# Allegro board WalkingAidDevice.brd
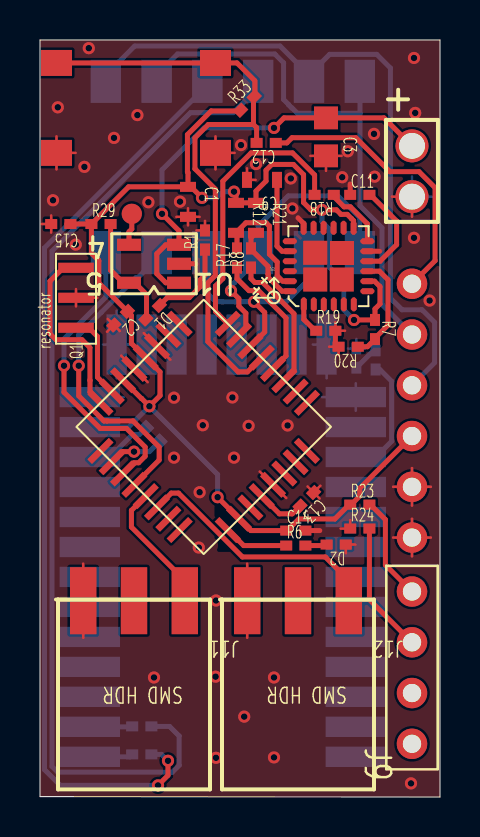
[diagram p0: board, top side]
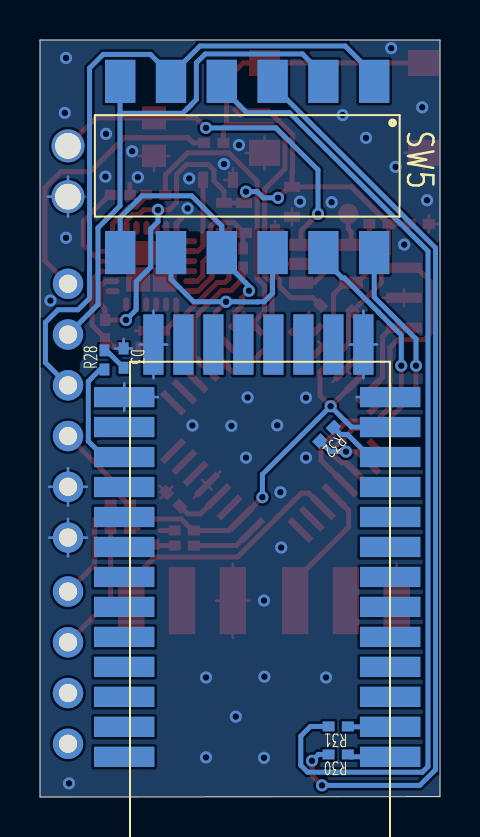
[diagram p1: board, bottom side, seen from below]

Outline 20 x 37.88 mm; copper layers: TOP, BOTTOM. Coordinates in mm from the lower left corner of the outline.
Outline path: 0,37.88 0,0.02 20,0 20,37.88 0,37.88

## Design rules (mm)
constraint set DEFAULT: min track width 0.127

## Placement (name value [footprint] x y rotation side)
C1  10uF  [0603]  7 30.58 270 top
C2  0.1uF  [0402]  4.2 24.48 225 top
C3  10uF  [0805]  13.7 34.08 270 top
C9  2.2nF  [0603]  11.9 31.28 180 top
C11  0.1uF  [0402]  15.5 29.88 0 top
C12  0.1uF  [0402]  11.8 32.98 180 top
C13  0.1uF  [0402]  13.51 15.42 225 top
C14  0.1uF  [0402]  12.3 13.08 0 top
C15  0.1uF  [0402]  1.53 28.92 180 top
D1  LED/RED  [0402]  5.8 24.78 225 top
D2  LED/Yellow  [0402]  15.3 12.88 180 top
D3  LED/Yellow  [0402]  16.07 22.45 270 bottom
J5  HEADER 6  [JUMPER6]  18.6 12.98 90 top
J9  HEADER 4  [JUMPER4]  18.6 10.28 270 top
J11  HEADER 3  [JUMPER3]  4.7 9.88 180 top
J12  HEADER 3  [JUMPER3]  12.9 9.88 180 top
NOREF  -  []  16.43 28.56 0 top
NOREF#2  -  []  20.05 24.68 90 top
P1  Power Connector  [350759-4]  18.6 32.58 270 top
Q1  8Mhz  [RESONATOR_V1]  1.8 24.98 90 top
R1  10K  [0402]  8.5 27.38 90 top
R6  330  [0402]  12.3 12.33 0 top
R7  470  [0402]  16.5 23.88 270 top
R8  0 Ohm  [0402]  10.8 26.48 90 top
R12  4.7K  [0603]  9.4 29.78 270 top
R17  0 Ohm  [0402]  10.1 26.48 90 top
R18  0 Ohm  [0402]  14.7 30.38 180 top
R19  0 Ohm  [0402]  13.8 23.08 0 top
R20  0 Ohm  [0402]  15.9 22.78 180 top
R21  4.7K  [0603]  10.4 29.78 270 top
R23  0 Ohm  [0402]  15.5 14.38 0 top
R24  0 Ohm  [0402]  15.5 13.18 0 top
R28  470  [0402]  16.53 21.38 90 bottom
R29  0 Ohm  [0402]  2.56 28.42 0 top
R30  0 Ohm  [0402]  4.6 2.38 0 bottom
R31  0 Ohm  [0402]  4.6 3.78 0 bottom
R32  0 Ohm  [0402]  5.5 18.68 315 bottom
R33  10K  [0402]  10.2 34.18 45 top
SW5  SW DIP-6  [SW_DIP_6X2]  7.1 31.68 270 bottom
SW6  SW PUSHBUTTON-SPST-2  [SW_4PINS]  4.8 34.48 0 top
TP1  TEST POINT  [TEST_POINT]  4.59 29.18 0 top
U1  MIC5205  [SOT23-5_V1]  5.7 26.68 180 top
U2  ATMEGA328  [TQFP32]  8.19 18.52 315 top
U3  MPU6050  [QFN-24]  16.3 24.68 90 top
U4  -  [HM10_BLE]  9.3 10.48 0 bottom

## Library data of the parts
C1 C3 = CAPACITOR
C2 C9 C11-C15 = CAPACITOR NON-POL
D1-D3 = LED
J5 = HEADER 6
J9 = HEADER 4
J11 J12 = HEADER 3
P1 = Power Connector
Q1 = Resonator
R1 R6-R8 R12 R17-R21 R23 R24 R28-R33 = R
SW5 = SW DIP-6
SW6 = SW PUSHBUTTON-SPST-2
TP1 = TEST POINT
U1 = MIC5205
U2 = ATMEGA328
U3 = MPU6050
U4 = HM10_BLE

## Footprints (pads in the part's own frame, mm; a bottom-side part is the same pattern mirrored in y, then rotated)
0402
  rect 0.6x0.5 smd: 1(0.01,0.25) 2(0.97,0.25)
0603
  rect 0.5x0.8 smd: 1(0.05,0.4) 2(1.55,0.4)
0805
  rect 1.14x1.2 smd: 1(0.1,0.6) 2(2,0.6)
350759-4
  round 1.651 hole 1.295: 1(0,0) 2(2.54,0)
HM10_BLE
  rect 3.023x1.016 smd: 1(-6.81,8.47) 2(-6.81,6.97) 3(-6.81,5.47) 4(-6.81,3.97) 5(-6.81,2.47) 6(-6.81,0.97) 7(-6.81,-0.53) 8(-6.81,-2.03) 9(-6.81,-3.53) 10(-6.81,-5.03) 11(-6.81,-6.53) 12(-6.81,-8.03) 13(-6.81,-9.53) 22(6.49,-9.53) 23(6.49,-8.03) 24(6.49,-6.53) 25(6.49,-5.03) 26(6.49,-3.53) 27(6.49,-2.03) 28(6.49,-0.53) 29(6.49,0.97) 30(6.49,2.47) 31(6.49,3.97) 32(6.49,5.47) 33(6.49,6.97) 34(6.49,8.47)
  rect 1.016x3.023 smd: 14(-5.47,-12.16) 15(-3.97,-12.16) 16(-2.47,-12.16) 17(-0.97,-12.16) 18(0.53,-12.16) 19(2.03,-12.16) 20(3.53,-12.16) 21(5.03,-12.16)
JUMPER3
  rect 1.321x3.353 smd: 1(-2.54,0.06) 2(0,0.06) 3(2.54,0.06)
JUMPER4
  round 1.524 hole 0.914: 1(0,0) 2(2.54,0) 3(5.08,0) 4(7.62,0)
JUMPER6
  round 1.524 hole 0.914: 1(0,0) 2(2.54,0) 3(5.08,0) 4(7.62,0) 5(10.16,0) 6(12.7,0)
QFN-24
  rect 1.2x1.2 smd: (1.21,2.54) (1.21,1.21) (2.54,1.2) (2.55,2.54)
  rrect 0.7x0.3 smd: 1(-0.03,3.11) 2(-0.03,2.61) 3(-0.03,2.11) 4(-0.03,1.61) 5(-0.03,1.11) 6(-0.03,0.61) 13(3.8,0.62) 14(3.8,1.12) 15(3.8,1.62) 16(3.8,2.12) 17(3.8,2.62) 18(3.8,3.12)
  rrect 0.3x0.7 smd: 7(0.63,-0.07) 8(1.13,-0.07) 9(1.63,-0.07) 10(2.13,-0.07) 11(2.63,-0.07) 12(3.13,-0.07) 19(3.13,3.81) 20(2.63,3.81) 21(2.13,3.81) 22(1.63,3.81) 23(1.13,3.81) 24(0.63,3.81)
RESONATOR_V1
  rect 0.508x1.778 smd: 1(-1.5,0) 2(0,0) 3(1.5,0)
SOT23-5_V1
  rect 1.194x0.61 smd: 1(-1.25,0.95) 2(-1.25,0) 3(-1.25,-0.95) 4(1.25,-0.95) 5(1.25,0.95)
SW_4PINS
  rect 1.55x1.3 smd: 1(3.975,-2.25) 2(-3.975,-2.25) 3(3.975,2.25) 4(-3.975,2.25)
SW_DIP_6X2
  rect 2.16x1.52 smd: 1(-4.13,3.81) 2(-4.13,1.27) 3(-4.13,-1.27) 4(-4.13,-3.81) 5(-4.13,-6.35) 6(-4.13,-8.89) 7(4.438,-8.89) 8(4.438,-6.35) 9(4.438,-3.81) 10(4.438,-1.27) 11(4.438,1.27) 12(4.438,3.81)
TEST_POINT
  round 1.016 smd: 1(0,0)
TQFP32
  rect 1.52x0.33 smd: 1(-4.5,2.8) 2(-4.5,2) 3(-4.5,1.2) 4(-4.5,0.4) 5(-4.5,-0.4) 6(-4.5,-1.2) 7(-4.5,-2) 8(-4.5,-2.8) 17(4.5,-2.8) 18(4.5,-2) 19(4.5,-1.2) 20(4.5,-0.4) 21(4.5,0.4) 22(4.5,1.2) 23(4.5,2) 24(4.5,2.8)
  rect 0.33x1.52 smd: 9(-2.8,-4.5) 10(-2,-4.5) 11(-1.2,-4.5) 12(-0.4,-4.5) 13(0.4,-4.5) 14(1.2,-4.5) 15(2,-4.5) 16(2.8,-4.5) 25(2.8,4.5) 26(2,4.5) 27(1.2,4.5) 28(0.4,4.5) 29(-0.4,4.5) 30(-1.2,4.5) 31(-2,4.5) 32(-2.8,4.5)

## Nets
GND: C1.2 C2.2 C3.2 C9.2 C11.1 C13.1 C14.2 C15.2 D2.1(CATHODE) D3.1(CATHODE) J5.1 J5.2 J11.3 J12.3 P1.2 Q1.2 R1.2 R19.2 R20.2 R24.1 SW6.1 SW6.2 U1.2 U2.3 U2.5 U2.21 U3.11 U3.18 U4.13 U4.14 U4.21 U4.22
VCC: C1.1 C2.1 C14.1 C15.1 J5.3 R7.1 R12.1 R21.1 R23.1 R29.1 R33.1 U2.4 U2.6(VCC1) U2.18 U3.8(VLOGIC) U3.13 U4.12(VCC)
VIN: C3.1 P1.1 U1.1 U1.3
A0: U2.23
A1: U2.24
A2: U2.25
A3: U2.26
A6: U2.19
A7: U2.22
AT328_A4_SDA: R8.1 U2.27
AT328_A5_SCL: R17.1 U2.28
AT328_AREF: C13.2 U2.20
AT328_INT: R18.2 U2.32
BLE_GND: J9.2 R24.2
BLE_PWR: J9.1 R23.2
BLE_RXD: J9.4 R31.2 SW5.4
BLE_TXD: J9.3 R30.2 SW5.3
D3: U2.1
D4: U2.2
D5: U2.9
D6: R32.2 U2.10
D7: SW5.12 U2.11
D8: SW5.11 U2.12
D9: J11.1 U2.13
D10: J12.1 U2.14
DTR: C12.1 J5.6
HM10_LED_L: R28.1 U4.24
HM10_LED_R: D3.2 R28.2
HM10_RESET_N_R: R32.1 U4.11
HM10_UART_RX: R31.1 U4.2
HM10_UART_TX: R30.1 U4.1
MIC5205_OUT_R_L: D1.2 R29.2 U1.5(OUT)
MISO: U2.16
MOSI: U2.15
MPU6050_AUX_CL: U3.7
MPU6050_AUX_DA: U3.6
MPU6050_CLKIN: R19.1 U3.1
MPU6050_CPOUT: C9.1 U3.20
MPU6050_INT: R18.1 U3.12
MPU6050_REGOUT: C11.2 U3.10
MPU6050_SCL: R12.2 R17.2 U3.23
MPU6050_SDA: R8.2 R21.2 U3.24
NC1: U3.2
NC2: U3.3
NC3: U3.4
NC4: U3.5
NC5: U3.14
NC6: U3.15
NC7: U3.16
NC8: U3.17
PWR_LED: D1.1(CATHODE) R1.1
RESET: C12.2 R33.2 SW6.3 SW6.4 U2.29
RESV1: U3.19
RESV2: U3.21
RESV3: U3.22
RXI: SW5.8 SW5.10 U2.30
SCK: R6.1 U2.17
SERIAL_RXI: J5.5 SW5.2 SW5.6
SERIAL_TXO: J5.4 SW5.1 SW5.5
TP2: U4.23
TP3: U4.4
TP4: U4.3
TXO: SW5.7(B6) SW5.9 U2.31
XTAL_TOSC1: Q1.1 U2.7
XTAL_TOSC2: Q1.3 U2.8
N09994: R7.2 R20.1 U3.9
N12520: TP1.1 U1.4
N17231: D2.2 R6.2

Pads without a net: J11 2; J12 2; U4 5 6 7 8 9 10 15 16 17 18 19 20 25 26 27 28 29 30 31 32 33 34

## Via types
v1: diameter 0.61, hole 0.33, TOP to BOTTOM, 53 vias

## Routing (per net, layer and track width the routed paths; a pad name or vN(x,y) marks a point on that pad's centre or on a via; arc(x,y) is an arc through that point)
GND: length 80.7
  TOP w0.127: SW6.2 0.82,33.06 ; SW6.2 1.78,32.23 ; SW6.2 0.82,31.41 ; U2.21 11.89,15.87 ; U2.21 10.99,16.29 ; U2.21 12.31,14.96 ; U2.21 11.41,15.38 ; J5.1 18.6,13.92 ; J5.1 17.66,12.98 ; J5.1 19.54,12.98 ; J5.1 18.6,12.04 ; J12.3 10.36,11.68 ; J12.3 9.52,9.82 ; J12.3 11.2,9.82 ; J12.3 10.36,7.97 ; 17.66,15.52 J5.2 ; J5.2 19.54,15.52 ; J5.2 18.6,16.46 ; J5.2 18.6,14.58 ; 15.25,23.33 R19.2 14.77,23.76 ; 10.78,30.88 C9.2 10.35,31.46 ; 3.39,23.92 C2.2 ; C2.2 3.35,23.28 ; C2.2 3.99,23.32 ; 14.93,22.11 R20.2 14.45,22.53 ; C1.2 7.4,29.46 ; C1.2 6.82,29.03 ; C1.2 7.4,28.61 ; C1.2 7.98,29.03 ; U2.5 5.38,20.76 ; U2.5 4.06,22.09 ; U2.5 4.48,21.18 ; U2.5 4.96,21.66 ; J11.3 2.16,11.68 ; J11.3 3,9.82 ; J11.3 2.16,7.97 ; J11.3 1.32,9.82 ; C3.2 15.08,32.08 ; C3.2 14.3,31.34 ; C3.2 13.52,32.08 ; 5.19,23.22 U2.3 ; U2.3 5.61,22.31 ; U2.3 6.09,22.8 ; U2.3 6.51,21.89 ; 0.56,28.25 C15.2 ; C15.2 0.08,28.67 ; C15.2 0.56,29.1 ; 1.8,24.55 Q1.2 ; Q1.2 1.8,25.42 ; Q1.2 2.87,24.98 ; C13.1 14.02,15.58 ; C13.1 13.98,14.94 ; C13.1 13.38,15.54 ; 15.77,12.63 D2.1 15.29,12.21 ; 8.77,31.41 SW6.1 ; SW6.1 9.73,32.23 ; SW6.1 8.77,33.06 ; 8.25,28.83 R1.2 7.82,28.35 ; 17.6,30.04 P1.2 18.6,29.04 ; 15.03,13.43 R24.1 15.51,13.86
  TOP w0.25: U3.11 16.97,27.31 ; U3.18 13.18,28.7 12.9,28.98 ; R20.2 14.77,22.69 R19.2 ; U1.2 7.8,26.68 ; C11.1 15.51,30.67 ; C14.2 13.99,13.33
  BOTTOM w0.127: 18.6,29.04 P1.2 ; P1.2 18.6,31.05 ; P1.2 19.6,30.04 ; 17.66,12.98 J5.1 ; J5.1 18.6,13.92 ; J5.1 18.6,12.04 ; J5.1 19.54,12.98 ; 18.6,14.58 J5.2 ; J5.2 19.54,15.52 ; J5.2 18.6,16.46 ; J5.2 17.66,15.52 ; 2.49,19.33 U4.13 ; U4.13 2.49,20.7 ; U4.13 4.18,20.01 ; U4.14 3.83,24.33 ; U4.14 4.52,22.64 ; U4.14 3.83,20.95 ; U4.14 3.14,22.64 ; D3.1 15.82,22.92 ; D3.1 16.25,22.44 ; D3.1 15.39,22.44 ; U4.21 15.02,22.64 ; U4.21 14.33,24.33 ; U4.21 13.64,22.64 ; U4.21 14.33,20.95 ; 15.79,19.33 U4.22 ; U4.22 14.1,20.01 ; U4.22 15.79,20.7
  vias: v1(0.65,29.86) v1(0.89,34.51) v1(1.79,27.64) v1(2.22,31.53) v1(2.44,37.47) v1(3.7,32.98) v1(4.87,34.12) v1(5.42,29.76) v1(5.7,5.98) v1(6.7,19.98) v1(6.7,16.98) v1(7,29.79) v1(7.94,12.48) v1(7.98,15.25) v1(8.14,18.6) v1(8.8,9.83) v1(8.78,6.02) v1(8.8,1.96) v1(9.62,19.99) v1(9.7,16.98) v1(10.05,32.62) v1(10.21,4.02) v1(10.43,18.57) v1(10.8,31.67) v1(11.7,5.98) v1(11.7,1.98) v1(12.38,18.59) v1(12.54,30.95) v1(12.62,29.45) v1(15.11,31.01) v1(15.39,32.31) v1(16.7,33.18) v1(16.73,31.04) v1(18.55,0.68) v1(18.7,36.98) v1(18.7,27.98) v1(18.76,34.23) v1(19.48,24.84)
VCC: length 69.9
  TOP w0.25: U3.13 15.68,28.84 15.58,28.94 15.58,28.94 15.36,29.16 15.05,29.16 14.82,29.38 v1(14.1,29.38) 13.54,29.38 13.18,29.75 13.18,31.15 12.67,31.65 11.59,31.65 11.3,31.36 11.3,30.82 10.8,30.32 R21.1 R12.1 9.8,30.18 9.7,30.28 v1(9.7,30.29) ; C1.1 4.43,30.53 R29.1 ; C1.1 7.55,30.53 v1(8.1,29.98) ; C1.1 7.4,31.25 7.37,31.28 7.37,33.14 8.56,34.33 10,34.33 R33.1 ; R29.1 2.57,27.21 2.9,26.88 2.94,26.84 2.94,25.73 C2.1 4.57,24.1 4.57,22.7 U2.4 6,21.27 6,20.08 v1(5.47,19.55) 5.08,19.95 5.06,19.95 U2.6 ; R29.1 C15.1 1.36,28.67 1.35,28.68 ; U3.8 16.73,25.81 17,25.54 17,24.68 16.75,24.43 R7.1 15.7,23.87 v1(15.7,23.87) ; v1(8.88,15) 8.88,15 U2.18 10.55,13.33 C14.1 12.36,13.33 12.94,13.91 14.74,13.91 15.46,14.63 R23.1 15.56,14.63 15.99,15.06 15.99,15.45 J5.3
  BOTTOM w0.25: v1(9.7,30.29) 9.14,30.29 8.83,29.98 v1(8.1,29.98) ; U4.12 4.43,18.51 v1(5.47,19.55) 8.88,16.14 v1(8.88,15) ; v1(15.7,23.87) 15.19,24.38 15.19,25.79 14.46,26.52 14.46,28.43 14.1,28.79 v1(14.1,29.38)
VIN: length 21.9
  TOP w0.25: U1.1 6.29,25.73 5.84,26.18 5.84,27.18 6.29,27.63 U1.3 6.95,28.33 v1(6.1,29.18) ; v1(11.7,33.48) 12.2,33.98 C3.1 17.2,33.98 P1.1
  BOTTOM w0.25: v1(6.1,29.18) 6.1,31.38 8.2,33.48 v1(11.7,33.48)
AT328_A4_SDA: length 7
  TOP w0.25: U2.27 12.7,21.34 12.7,24.18 11.13,25.75 10.74,25.75 10.55,25.94 R8.1
AT328_A5_SCL: length 6.6
  TOP w0.25: U2.28 12.3,22.07 12.3,23.97 10.93,25.34 10.45,25.34 9.85,25.94 R17.1
AT328_AREF: length 2.4
  TOP w0.25: U2.20 11.97,14.17 12.61,14.17 C13.2
AT328_INT: length 14.2
  TOP w0.25: R18.2 13.73,31.13 12.63,32.23 10.55,32.23 9.14,30.82 9.14,25.94 8.77,25.57 8.77,24.3 8.92,24.15 U2.32
BLE_GND: length 6.6
  TOP w0.25: R24.2 16.47,9.87 J9.2
BLE_PWR: length 5.3
  TOP w0.25: J9.1 17.27,11.61 17.27,13.88 16.52,14.63 R23.2
BLE_RXD: length 49.5
  BOTTOM w0.25: R31.2 6.48,3.53 6.96,3.05 6.96,1.59 6.62,1.24 0.88,1.24 0.6,1.53 0.6,27.32 7.52,34.24 9.66,34.24 10.91,35.49 SW5.4
BLE_TXD: length 46.2
  TOP w0.25: v1(5.9,0.58) 6.4,1.08 v1(6.4,1.81)
  BOTTOM w0.25: SW5.3 8.37,35.62 0.22,27.48 0.22,1.37 1.01,0.58 v1(5.9,0.58) ; R30.2 6.08,2.13 v1(6.4,1.81)
D6: length 2.9
  TOP w0.25: U2.10 4.12,17.28 v1(4.7,17.28)
  BOTTOM w0.25: R32.2 5.47,17.28 v1(4.7,17.28)
D7: length 15
  TOP w0.25: U2.11 4.69,16.73 4.93,16.73 5.26,17.05 5.26,17.51 4.33,18.44 3.18,18.44 3.18,18.44 3.01,18.44 1.2,20.25 v1(1.2,21.58)
  BOTTOM w0.25: SW5.12 3.29,25.01 1.2,22.92 v1(1.2,21.58)
D8: length 16.3
  TOP w0.25: U2.12 5.96,16.86 5.96,17.51 4.65,18.82 3.34,18.82 3.34,18.82 3.19,18.82 1.94,20.08 v1(1.94,21.58)
  BOTTOM w0.25: SW5.11 5.83,26.93 4.89,25.99 4.8,25.99 3.07,24.26 3.07,24.25 1.94,23.12 v1(1.94,21.58)
D9: length 6.6
  TOP w0.25: J11.1 7.24,10.84 4.57,13.51 4.57,14.34 U2.13
D10: length 12.7
  TOP w0.25: J12.1 15.44,10.84 14.27,12.01 10.12,12.01 6.92,15.21 6.57,15.21 U2.14
DTR: length 14.4
  TOP w0.25: J5.6 19.75,26.84 19.75,30.49 18.95,31.29 17.49,31.29 15.79,32.99 12.6,32.99 12.34,32.73 C12.1
HM10_LED_L: length 6.2
  BOTTOM w0.25: R28.1 16.99,21.39 17.59,20.8 17.59,17.81 16.79,17.01 U4.24
HM10_LED_R: length 1.3
  BOTTOM w0.25: R28.2 16.69,22.35 D3.2
HM10_RESET_N_R: length 3.5
  BOTTOM w0.25: U4.11 3.49,17.01 4.62,18.14 4.98,18.14 R32.1
HM10_UART_RX: length 2.1
  BOTTOM w0.25: U4.2 4.59,3.51 R31.1
HM10_UART_TX: length 2.2
  BOTTOM w0.25: U4.1 4.49,2.01 R30.1
MIC5205_OUT_R_L: length 5.9
  TOP w0.25: R29.2 3.53,26.36 4.16,25.73 U1.5 4.74,25.73 5.33,25.15 5.33,23.96 D1.2
MPU6050_CLKIN: length 1.6
  TOP w0.25: U3.1 13.19,23.9 13.76,23.33 R19.1
MPU6050_CPOUT: length 4.1
  TOP w0.25: U3.20 12.1,27.31 11.85,27.56 C9.1
MPU6050_INT: length 3.2
  TOP w0.25: U3.12 16.37,28.68 15.52,29.53 15.2,29.53 14.69,30.05 R18.1
MPU6050_REGOUT: length 4.9
  TOP w0.25: U3.10 17.01,26.81 17.83,27.64 17.83,28.82 16.52,30.13 C11.2
MPU6050_SCL: length 6.1
  TOP w0.25: R17.2 9.85,28.18 R12.2 9.8,28.24 10.3,28.74 11.3,28.74 11.47,28.57 11.47,27.16 11.86,26.77 11.86,26.09 12.13,25.81 U3.23
MPU6050_SDA: length 4.1
  TOP w0.25: R21.2 10.55,27.98 R8.2 10.55,27.4 11.4,26.55 11.4,26.18 11.41,26.17 11.41,26.01 12.1,25.31 U3.24
PWR_LED: length 4.4
  TOP w0.25: D1.1 6.36,24.99 7.46,24.99 8.02,25.54 8.02,25.89 8.25,26.12 R1.1
RESET: length 31.1
  TOP w0.25: 10.67,33.65 8.41,33.65 7.75,32.99 7.75,31.44 8.77,30.42 8.77,26.1 8.4,25.73 8.4,22.79 9.91,21.27 10.37,21.27 U2.29 ; 10.67,33.65 10.67,35.01 R33.2 10.74,35.08 10.74,35.84 9.85,36.73 SW6.3 SW6.4 ; 10.67,33.65 10.83,33.5 C12.2
RXI: length 11.8
  TOP w0.25: v1(10.7,24.78) 11.23,24.25 11.23,23.27 U2.30
  BOTTOM w0.25: SW5.10 8.37,25.21 8.8,24.78 9.11,24.78 9.12,24.78 9.78,24.78 9.79,24.78 v1(10.7,24.78) 12.32,24.78 13.45,25.91 SW5.8
SCK: length 3.2
  TOP w0.25: R6.1 10.18,12.58 9.93,12.83 9.92,12.83 U2.17
SERIAL_RXI: length 27
  BOTTOM w0.25: SW5.2 5.83,36.13 6.88,37.18 11.74,37.18 12.18,36.74 12.18,34.9 12.44,34.65 12.44,34.63 12.59,34.48 12.6,34.48 12.87,34.21 16,34.21 ; SW5.6 16,35.8 16,34.21 ; J5.5 17.1,24.64 17.1,28.48 16,29.58 16,34.21
SERIAL_TXO: length 34.6
  BOTTOM w0.25: 13.45,36.13 14.48,37.16 16.84,37.16 17.52,36.48 17.52,24.96 18.1,24.38 19.1,24.38 19.73,23.75 19.73,21.73 J5.4 ; 13.45,36.13 SW5.5 ; 13.45,36.13 12,37.58 4.74,37.58 3.29,36.13 SW5.1
TXO: length 14.4
  TOP w0.25: v1(9.55,25.33) 9.94,24.94 9.94,24.56 10.29,24.21 10.29,23.46 U2.31
  BOTTOM w0.25: SW5.7 15.99,28.99 14.9,30.08 12.42,30.08 10.91,28.58 SW5.9 10.91,26.93 9.72,25.74 9.72,25.74 9.55,25.56 v1(9.55,25.33)
XTAL_TOSC1: length 4.3
  TOP w0.25: Q1.1 2.44,23.48 2.87,23.05 2.87,21.01 U2.7
XTAL_TOSC2: length 9.5
  TOP w0.25: U2.8 2.5,20.25 2.5,20.85 2.5,20.85 2.5,22.49 2.1,22.88 0.8,22.88 0.5,23.18 0.5,25.82 1.16,26.48 Q1.3
N09994: length 5.5
  TOP w0.25: U3.9 16.97,26.31 17.4,25.89 17.4,23.61 16.75,22.96 R7.2 16.37,22.53 R20.1
N12520: length 1.6
  TOP w0.25: TP1.1 4.59,28.42 4.45,28.28 U1.4
N17231: length 1.1
  TOP w0.25: R6.2 14.28,12.58 D2.2

## Copper pours and planes (outline as drawn; the poured copper is in the pictures)
GND on TOP: 0,0.02 0,37.88 20,37.88 20,0 ; 8 cut-outs
GND on BOTTOM: 20,37.88 20,0 0,0.02 0,37.88 ; 6 cut-outs
